# EAGLE board TeklaShieldSMD (EAGLE 5.07)
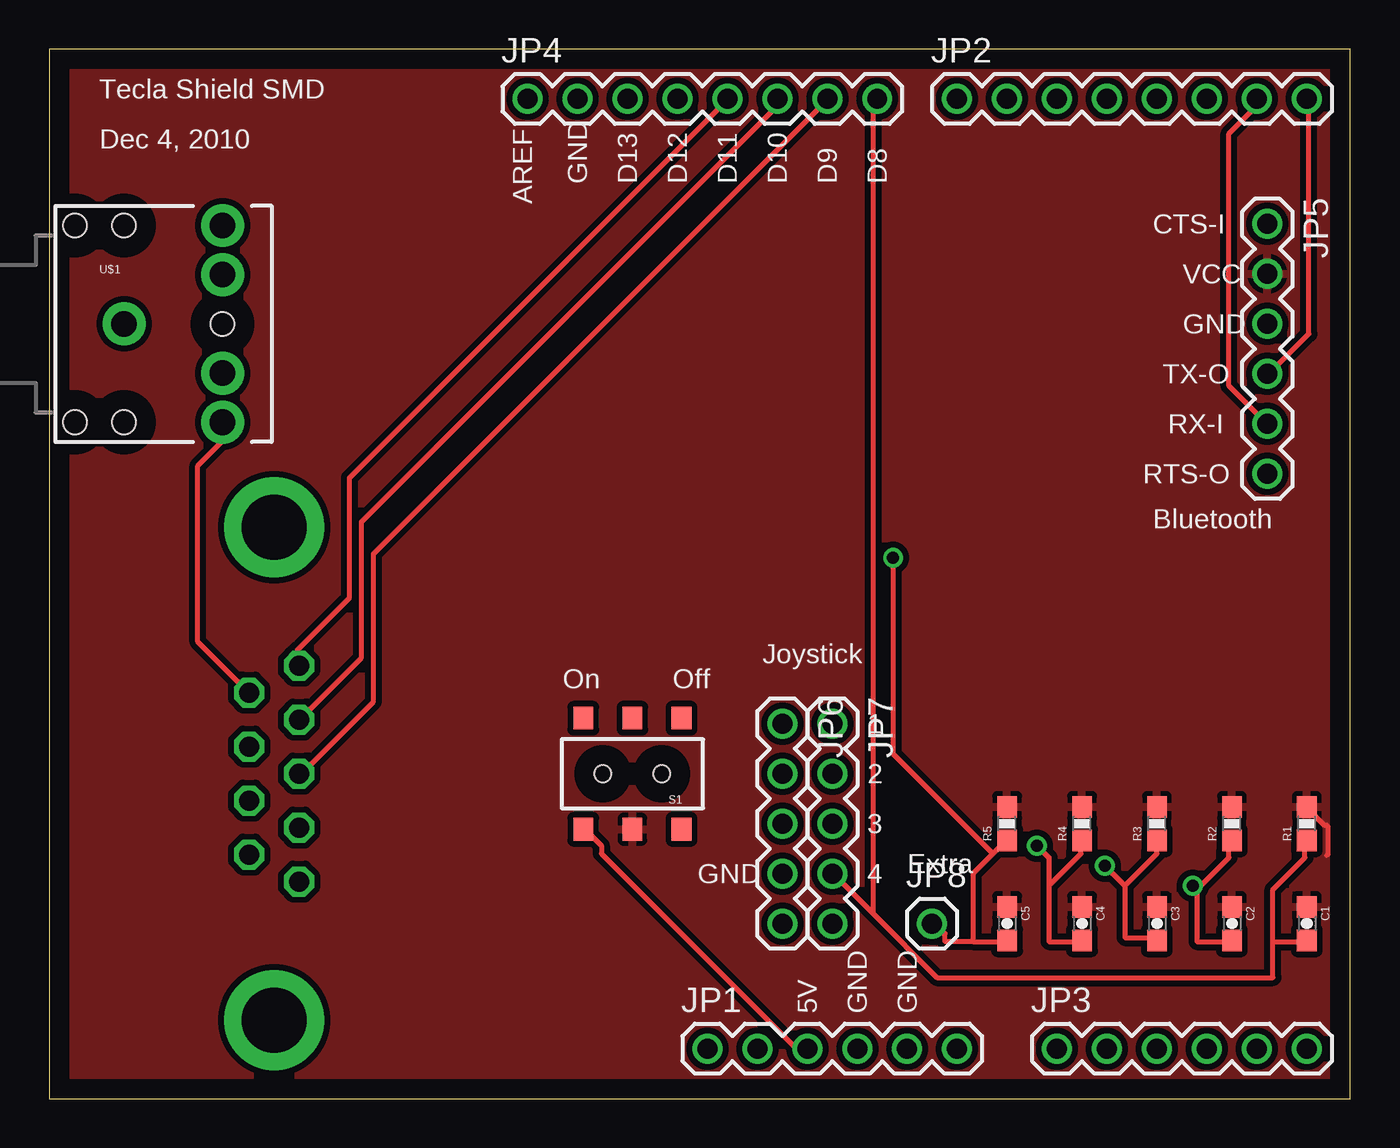
[diagram p0: board, top side]
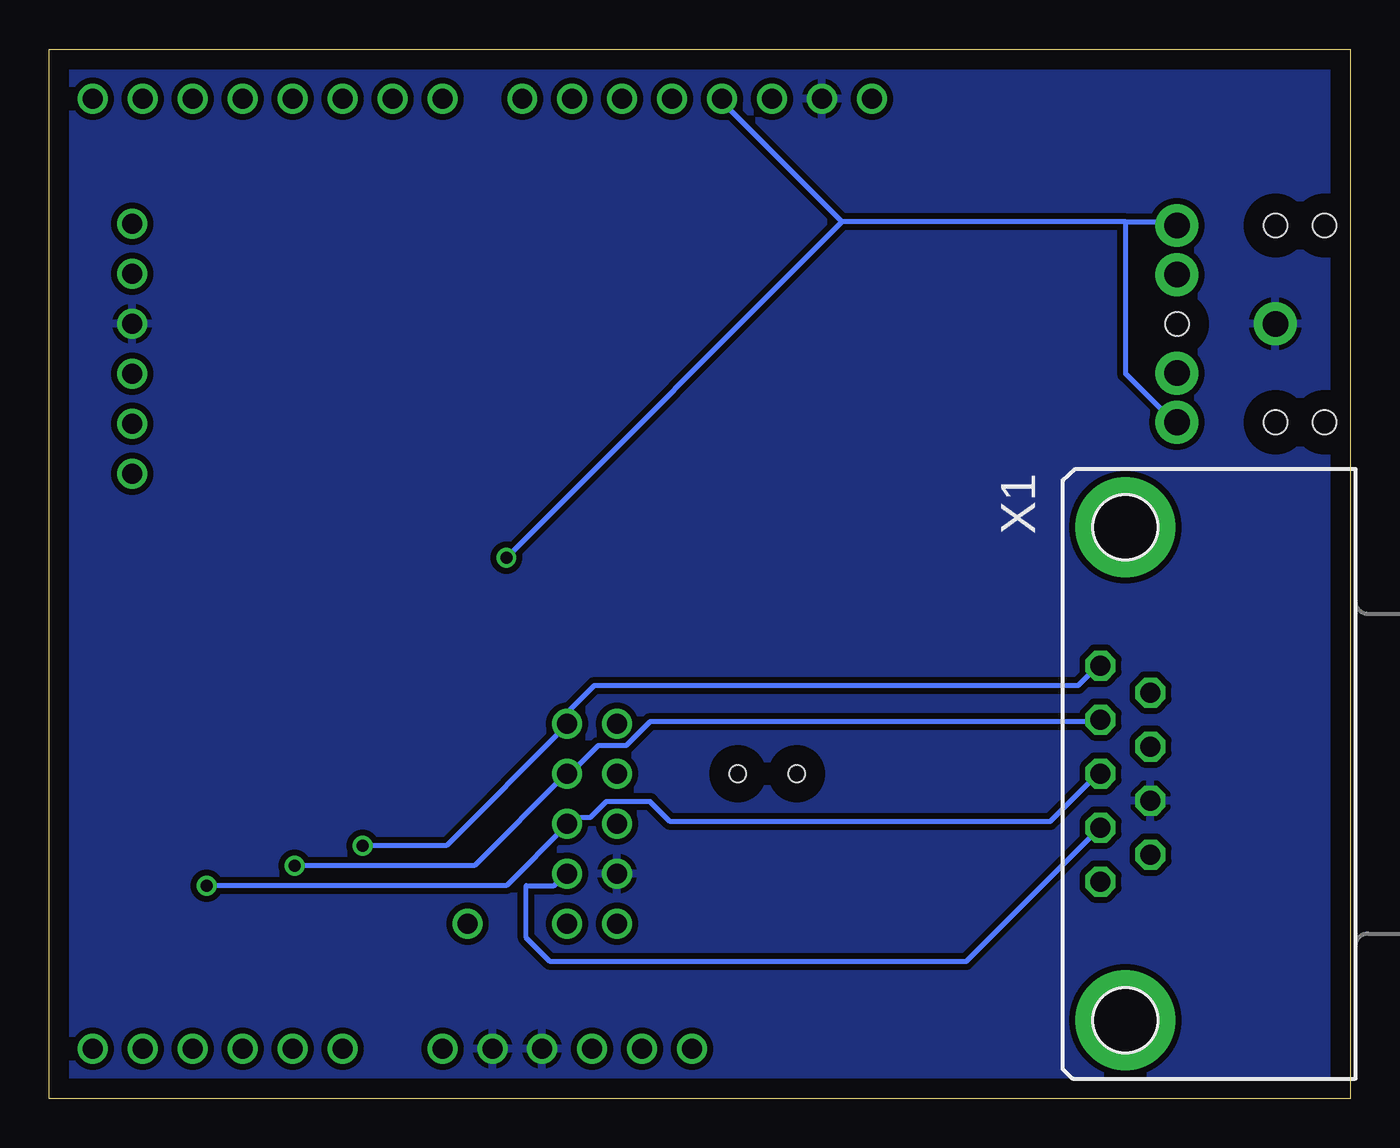
[diagram p1: board, bottom side, seen from below]

Size 66.15 x 53.33 mm. Coordinates in mm from the lower left corner, seen from the top.
Outline: 0,0 66.15,0 66.15,53.33 0,53.33 0,0
Copper layers (1*16): Top 0.035mm / dielectric 1.5mm / Bottom 0.035mm
Design rules "default *": minimum track width 10mil, minimum drill 24mil, track to track 8mil, track to pad 8mil, pad to pad 8mil, via to via 8mil, smd to smd 8mil, copper to edge 40mil, drill to drill 8mil, minimum pad ring 10mil, minimum via ring 8mil, stop-mask expansion 4mil, vias tented up to drill 0mil, thermal gap 10mil

## Footprints (pad centres in the part's own frame; a part is rotated, then mirrored left to right if it is on the bottom)
0603-CAP = smd 1.1 x 1: 1 -0.85,0; 2 0.85,0
1X06 = drill 1.016 round: 1 0,0; 2 2.54,0; 3 5.08,0; 4 7.62,0; 5 10.16,0; 6 12.7,0
1X08 = drill 1.016 round: 1 0,0; 2 2.54,0; 3 5.08,0; 4 7.62,0; 5 10.16,0; 6 12.7,0; 7 15.24,0; 8 17.78,0
1X05 = drill 1.016 round: 1 0,0; 2 2.54,0; 3 5.08,0; 4 7.62,0; 5 10.16,0
1X01 = drill 1.016 round: 1 0,0
0603-RES = smd 1.1 x 1: 1 -0.85,0; 2 0.85,0
AYZ0202 = smd 1 x 1.15: 1 -2.5,2.825; 2 0,2.825; 3 2.5,2.825; 4 -2.5,-2.825; 5 0,-2.825; 6 2.5,-2.825 | hole 0.85: 1.5,0; -1.5,0
AUDIO-JACK = drill 1.3 pad 2.184 round: 1 0,0; 2 5,5; 3 5,2.5; 4 5,-2.5; 5 5,-5 | hole 1.2: 0,5; -2.5,5; -2.5,-5; 0,-5; 5,0
DB9 = drill 1.016 octagon: 1 -5.486,-1.27; 2 -2.743,-1.27; 3 0,-1.27; 4 2.743,-1.27; 5 5.486,-1.27; 6 -4.115,1.27; 7 -1.372,1.27; 8 1.372,1.27; 9 4.115,1.27 | drill 3.302 pad 5.08 round: G1 -12.522,0; G2 12.522,0

## Placement (x,y rotation side)
C1  0.47uF  [0603-CAP]  63.94,8.89 270 top
C2  0.47uF  [0603-CAP]  60.13,8.89 270 top
C3  0.47uF  [0603-CAP]  56.32,8.89 270 top
C4  0.47uF  [0603-CAP]  52.51,8.89 270 top
C5  0.47uF  [0603-CAP]  48.7,8.89 270 top
JP1  Power  [1X06]  33.46,2.54 0 top
JP2  Digital1  [1X08]  46.16,50.8 0 top
JP3  Analog  [1X06]  51.24,2.54 0 top
JP4  Digital2  [1X08]  24.32,50.8 0 top
JP5  Bluetooth  [1X06]  61.94,44.45 270 top
JP6  Joystick1  [1X05]  37.27,19.05 270 top
JP7  Joystick2  [1X05]  39.81,19.05 270 top
JP8  Extra Pin  [1X01]  44.89,8.89 0 top
R1  1K  [0603-RES]  63.94,13.97 90 top
R2  1K  [0603-RES]  60.13,13.97 90 top
R3  1K  [0603-RES]  56.32,13.97 90 top
R4  1K  [0603-RES]  52.51,13.97 90 top
R5  1K  [0603-RES]  48.7,13.97 90 top
S1  [AYZ0202]  29.65,16.51 180 top
U$1  AUDIO-JACKPTH  [AUDIO-JACK]  3.81,39.37 0 top
X1  Joystick  [DB9]  11.43,16.51 270 bottom

## Library data of the parts
C1-C5 R1-R5 S1 U$1 = SparkFun
JP1-JP8 X1 = SparkFun-3-2-07

## Nets
+5V: C1.1 C2.1 C3.1 C4.1 C5.1 JP5.2 R1.2 R2.2 R3.2 R4.2 R5.2 S1.2
N$1: JP2.8 JP5.4
N$2: JP2.7 JP5.5
N$3: JP1.3 S1.3
N$4: C3.2 JP4.6 JP7.2 R3.1 X1.2
N$5: C4.2 JP4.5 JP7.1 R4.1 X1.1
N$7: C5.2 JP4.4 JP8.1 R5.1 U$1.2 U$1.5 X1.6
N$16: C1.2 JP4.8 JP7.4 R1.1 X1.4
PE: JP1.4 JP1.5 JP4.2 JP5.3 JP6.4 U$1.1 X1.8
X1: C2.2 JP4.7 JP7.3 R2.1 X1.3

## Tracks (layer width: path | path; a pad name or v marks a point on that pad's centre or on a via)
+5V
  Top 0.254: 64.93,12.34 65.01,12.39 65.01,13.82 64.93,13.9 64.85,13.87 64.04,14.68 R1.2
  pour Top (isolate 0.305): -4.2,53.34 66.48,53.34 66.04,-1.27 -4.2,-1.27
N$1
  Top 0.254: JP5.4 62.01,36.83 64.04,38.86 64.04,50.65 JP2.8
N$2
  Top 0.254: JP5.5 61.81,34.39 59.98,36.22 59.98,49.02 61.4,50.44 JP2.7
N$3
  Top 0.254: S1.3 27.26,13.66 28.08,12.85 28.08,12.45 37.83,2.69 38.44,2.69 JP1.3
N$4  (via drill 0.61)
  Top 0.254: 54.69,10.82 54.69,8.18 56.32,8.18 C3.2 | 54.69,10.82 56.32,12.45 R3.1 | v53.68,11.84 54.69,10.82 | X1.2 12.83,19.36 15.88,22.4 15.88,29.31 37.02,50.44 JP4.6
  Bottom 0.254: v53.68,11.84 44.53,11.84 39.86,16.51 JP7.2 39.66,16.51 38.23,17.93 36.81,17.93 35.59,19.15 12.83,19.15 X1.2
N$5  (via drill 0.61)
  Top 0.254: 50.83,10.82 50.83,7.98 52.46,7.98 C4.2 | 50.83,10.82 52.46,12.45 52.46,13.06 R4.1 | v50.22,12.85 50.83,12.24 50.83,10.82 | JP4.5 34.37,50.65 15.27,31.55 15.27,25.45 12.63,22.81 12.63,22 X1.1
  Bottom 0.254: v50.22,12.85 45.96,12.85 39.86,18.95 JP7.1 39.66,19.15 39.66,19.76 38.44,20.98 13.85,20.98 12.83,22 X1.1
N$7  (via drill 0.61)
  Top 0.254: 44.89,8.74 JP8.1 44.94,8.99 45.55,8.38 45.55,7.98 46.97,7.98 | X1.6 9.99,20.78 7.55,23.22 7.55,32.16 8.77,33.38 8.77,34.19 U$1.5 | 46.97,7.98 48.6,7.98 C5.2 | 47.99,12.45 46.97,11.43 46.97,7.98 | 47.99,12.45 48.6,13.06 R5.1 | 47.99,12.45 42.91,17.53 v42.91,27.48
  Bottom 0.254: 25.84,44.55 31.94,50.65 JP4.4 | 11.41,44.55 8.97,44.55 U$1.2 | 11.41,44.55 25.84,44.55 | 25.84,44.55 v42.91,27.48 | 11.41,44.55 11.41,36.83 8.97,34.39 U$1.5
N$16
  Top 0.254: 62.21,7.98 63.84,7.98 C1.2 | 62.21,7.98 62.21,10.62 63.84,12.24 63.84,13.06 R1.1 | 41.89,9.4 45.14,6.15 62.21,6.15 62.21,7.98 | 41.89,9.4 39.86,11.43 JP7.4 | 41.89,9.4 41.89,50.44 42.1,50.65 JP4.8
  Bottom 0.254: X1.4 12.83,13.66 19.54,6.96 40.67,6.96 41.89,8.18 41.89,10.82 40.47,10.82 39.86,11.43 JP7.4
PE
  pour Bottom (isolate 0.305): -4.2,53.34 66.48,53.34 66.48,0 -4.2,0
X1  (via drill 0.61)
  Top 0.254: 58.35,10.62 58.35,7.98 59.98,7.98 C2.2 | 58.35,10.62 59.98,12.24 59.98,13.06 R2.1 | v58.15,10.82 58.35,10.62 | JP4.7 39.45,50.65 16.49,27.69 16.49,20.17 12.83,16.51 X1.3
  Bottom 0.254: v58.15,10.82 42.91,10.82 39.86,13.87 JP7.3 39.66,14.07 39.45,14.28 38.64,14.28 37.83,15.09 35.59,15.09 34.58,14.07 15.27,14.07 12.83,16.51 X1.3

## Text on the board
tPlace: Tecla Shield SMD | Dec 4, 2010 | GND | D13 | D12 | D11 | D10 | D9 | D8 | AREF | CTS-I | VCC | GND | TX-O | RX-I | RTS-O | Bluetooth | Joystick | On | Off | 1 | 2 | 3 | GND | 4 | Extra | 5V | GND | GND